# EAGLE board GWLSensorv4 (EAGLE 9.5.2)
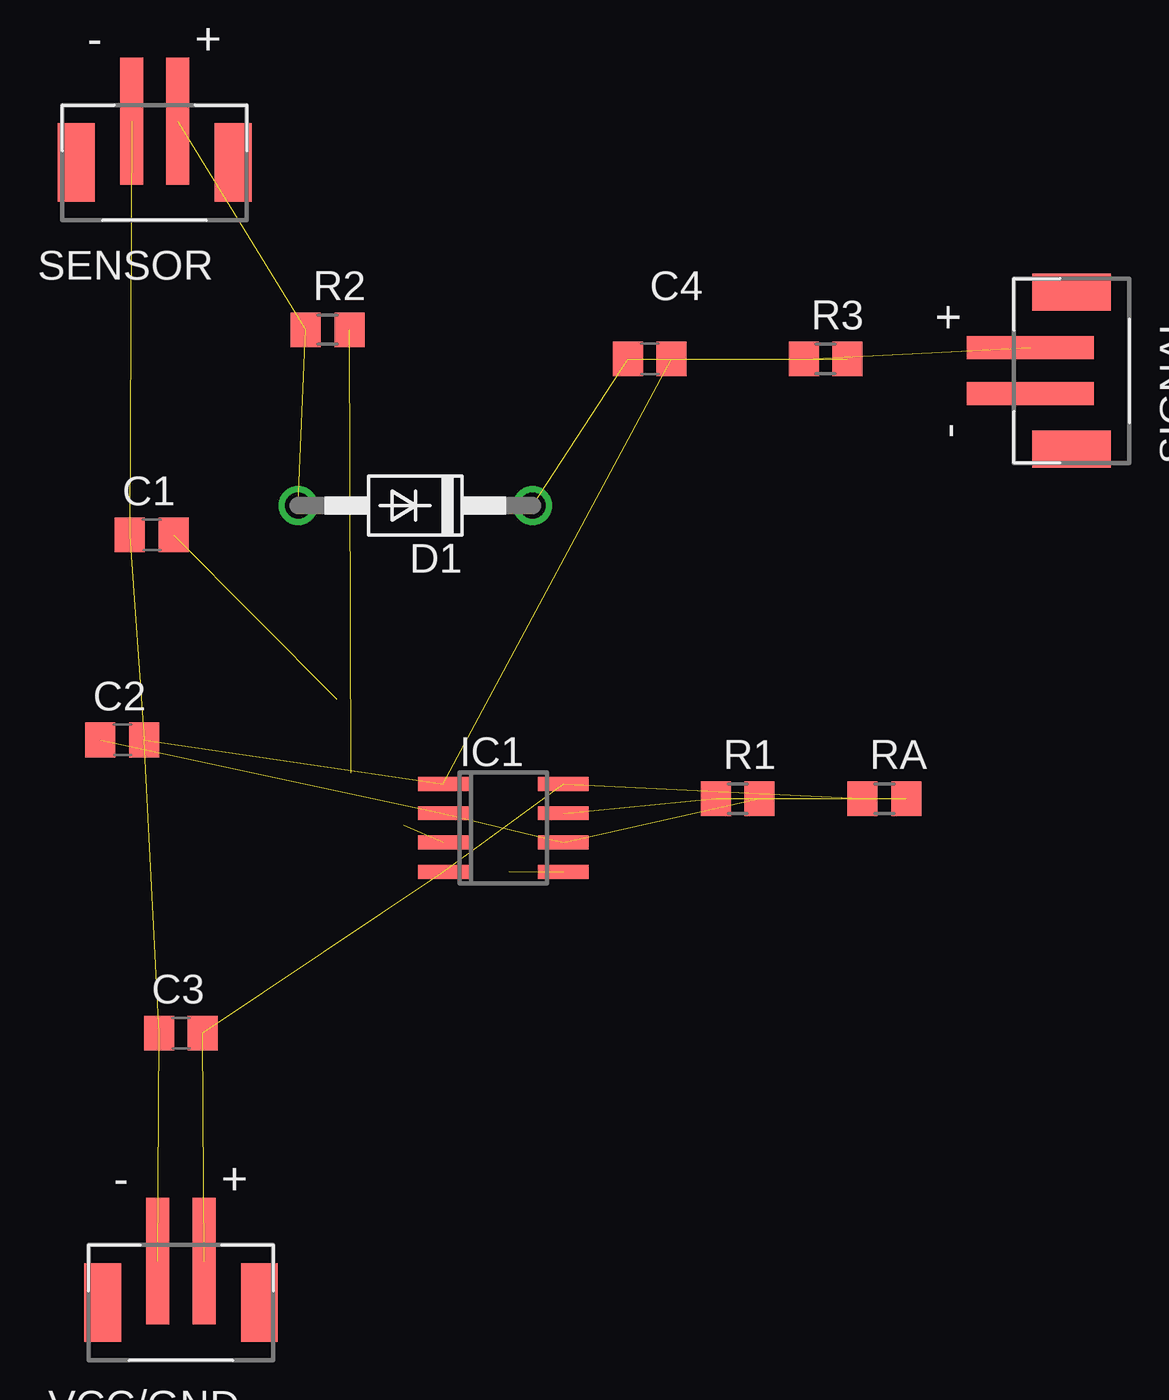
[diagram p0: board, top side]
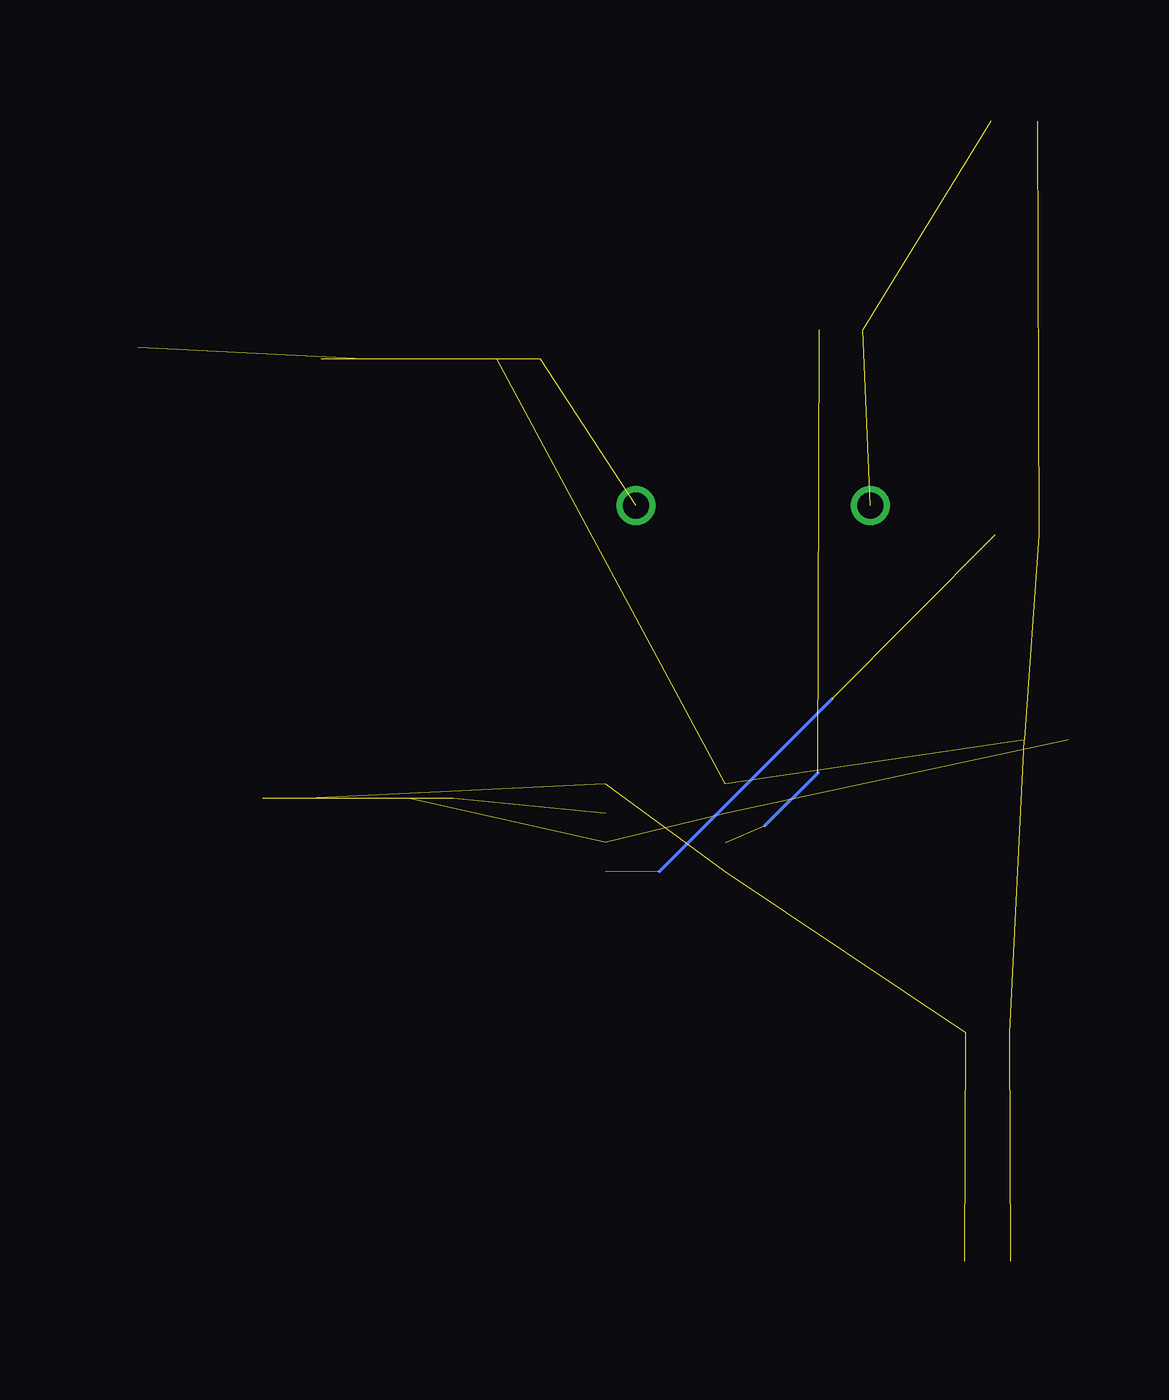
[diagram p1: board, bottom side, seen from below]

No outline drawn. Coordinates in mm, seen from the top.
Copper layers (1*16): Top 0.035mm / dielectric 1.5mm / Bottom 0.035mm
Design rules "default": minimum track width 6mil, minimum drill 0.35mm, track to track 6mil, track to pad 6mil, pad to pad 6mil, via to via 6mil, smd to smd 6mil, copper to edge 40mil, drill to drill 6mil, minimum pad ring 10mil, minimum via ring 8mil, stop-mask expansion 4mil, vias tented up to drill 0mil, thermal gap 10mil

## Footprints (pad centres in the part's own frame; a part is rotated, then mirrored left to right if it is on the bottom)
C0805 = smd 1.3 x 1.5: 1 -0.95,0; 2 0.95,0
DO41-10 = drill 1.118: A 5.08,0; C -5.08,0
SO08 = smd 0.6 x 2.2: 1 -1.905,-2.6; 2 -0.635,-2.6; 3 0.635,-2.6; 4 1.905,-2.6; 5 1.905,2.6; 6 0.635,2.6; 7 -0.635,2.6; 8 -1.905,2.6
R0805 = smd 1.3 x 1.5: 1 -0.95,0; 2 0.95,0
JST-PH-2-SMT = smd 1 x 5.5: 1 -1,-1.8; 2 1,-1.8 | smd 1.6 x 3.4: NC1 -3.4,0; NC2 3.4,0

## Placement (x,y rotation side)
C1  10nf  [C0805]  8.89,74.93 0 top
C2  470pf  [C0805]  7.62,66.04 0 top
C3  100nf  [C0805]  10.16,53.34 0 top
C4  1n  [C0805]  30.48,82.55 0 top
D1  1N4004  [DO41-10]  20.32,76.2 180 top
IC1  LM555D  [SO08]  24.13,62.23 270 top
R1  1K6  [R0805]  34.29,63.5 0 top
R2  10K  [R0805]  16.51,83.82 0 top
R3  1M  [R0805]  38.1,82.55 0 top
RA  330  [R0805]  40.64,63.5 0 top
SENSOR  [JST-PH-2-SMT]  9.02,91.06 180 top
SIGNAL  [JST-PH-2-SMT]  48.77,82.04 270 top
VCC/GND  [JST-PH-2-SMT]  10.16,41.66 180 top

## Library data of the parts
C1-C4 R1-R3 RA = rcl
D1 = diode
IC1 = linear
SENSOR SIGNAL VCC/GND = adafruit

## Nets
GND: C1.1 C2.2 C3.1 C4.2 IC1.1 R3.2 SENSOR.2 VCC/GND.2
N$1: C4.1 D1.C R3.1 SIGNAL.1
N$2: IC1.7 R1.1 RA.2
N$3: C2.1 IC1.2 IC1.6 R1.2
N$4: C1.2 IC1.5
N$6: D1.A R2.1 SENSOR.1
N$7: IC1.3 R2.2
VCC: C3.2 IC1.4 IC1.8 RA.1 VCC/GND.1

## Tracks (layer width: path | path; a pad name or v marks a point on that pad's centre or on a via)
GND  (7 unrouted)
N$1  (3 unrouted)
N$2  (2 unrouted)
N$3  (3 unrouted)
N$4  (2 unrouted)
  Bottom 0.152: 24.38,60.35 16.92,67.82
N$6  (2 unrouted)
N$7  (2 unrouted)
  Bottom 0.152: 19.81,62.33 17.53,64.62
VCC  (4 unrouted)